# EAGLE board Power_Cape (EAGLE 7.7.0)
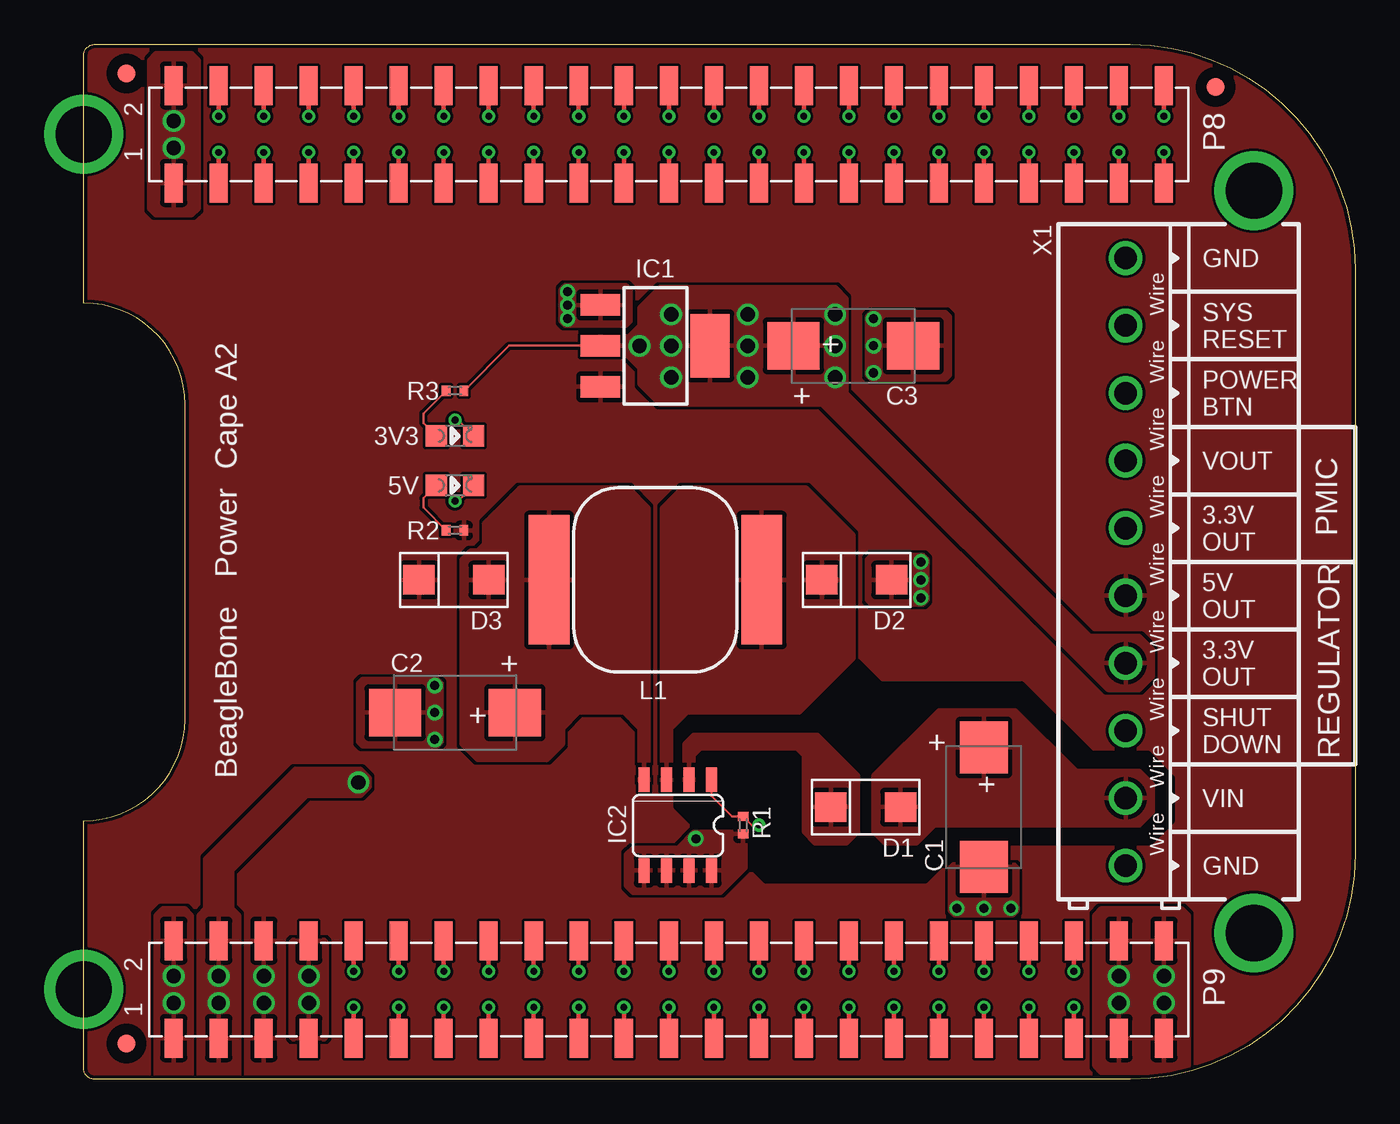
[diagram p0: board, top side]
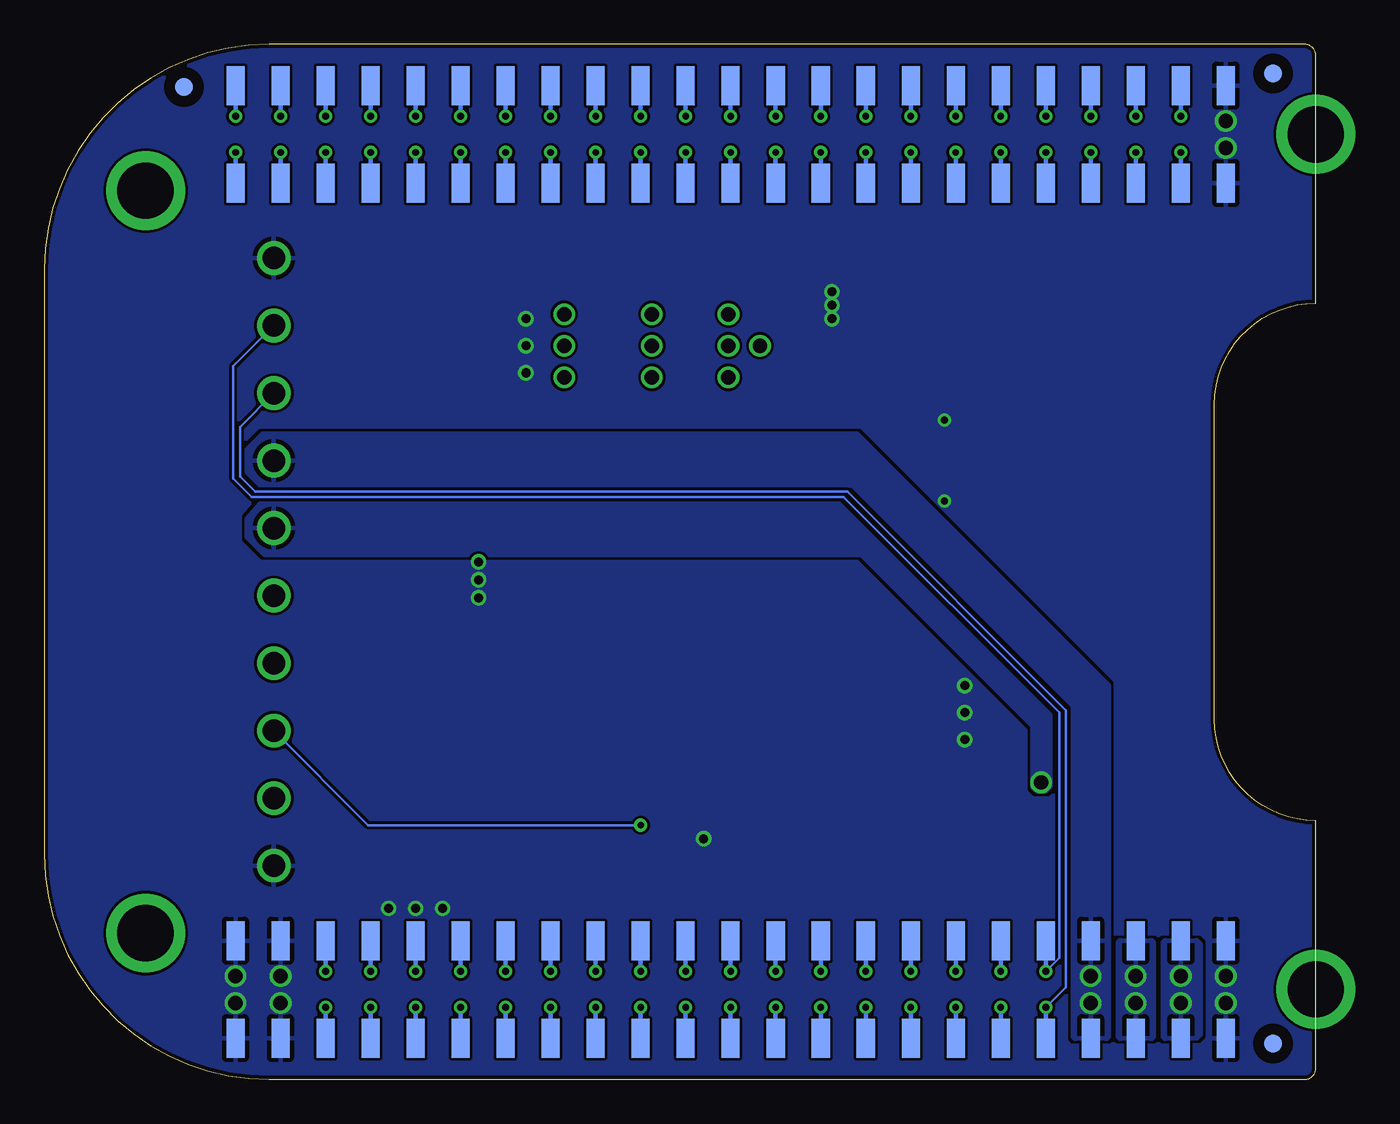
[diagram p1: board, bottom side, seen from below]

Size 71.75 x 58.42 mm. Coordinates in mm from the lower left corner, seen from the top.
Copper layers (1+16): Top 0.035mm / dielectric 1.5mm / Bottom 0.035mm
Design rules "SparkFun-2-layer *": minimum track width 6mil, minimum drill 15mil, track to track 6mil, track to pad 6mil, pad to pad 6mil, via to via 6mil, smd to smd 6mil, copper to edge 8mil, drill to drill 8mil, minimum pad ring 12mil, minimum via ring 7mil, stop-mask expansion 4mil, vias tented up to drill 32mil, thermal gap 10mil
tRestrict: area 32.1,11.4 to 32.4,12.1; area 33.4,11.4 to 33.7,12.1; area 34.7,11.4 to 34.9,12.1; 16 lines

## Footprints (pad centres in the part's own frame; a part is rotated, then mirrored left to right if it is on the bottom)
0805-LED = smd 1.2 x 1.2: A 0,1.05; K 0,-1.05
BEAGLEBONE.CAPE.TOP/BOTTOM-PADS = smd 1.02 x 2.2 bottom: B8.1 5.08,50.59; B8.2 5.08,56.09; B8.3 7.62,50.59; B8.4 7.62,56.09; B8.5 10.16,50.59; B8.6 10.16,56.09; B8.7 12.7,50.59; B8.8 12.7,56.09; B8.9 15.24,50.59; B8.10 15.24,56.09; B8.11 17.78,50.59; B8.12 17.78,56.09; B8.13 20.32,50.59; B8.14 20.32,56.09; B8.15 22.86,50.59; B8.16 22.86,56.09; B8.17 25.4,50.59; B8.18 25.4,56.09; B8.19 27.94,50.59; B8.20 27.94,56.09; B8.21 30.48,50.59; B8.22 30.48,56.09; B8.23 33.02,50.59; B8.24 33.02,56.09; B8.25 35.56,50.59; B8.26 35.56,56.09; B8.27 38.1,50.59; B8.28 38.1,56.09; B8.29 40.64,50.59; B8.30 40.64,56.09; B8.31 43.18,50.59; B8.32 43.18,56.09; B8.33 45.72,50.59; B8.34 45.72,56.09; B8.35 48.26,50.59; B8.36 48.26,56.09; B8.37 50.8,50.59; B8.38 50.8,56.09; B8.39 53.34,50.59; B8.40 53.34,56.09; B8.41 55.88,50.59; B8.42 55.88,56.09; B8.43 58.42,50.59; B8.44 58.42,56.09; B8.45 60.96,50.59; B8.46 60.96,56.09; B9.1 5.08,2.33; B9.2 5.08,7.83; B9.3 7.62,2.33; B9.4 7.62,7.83; B9.5 10.16,2.33; B9.6 10.16,7.83; B9.7 12.7,2.33; B9.8 12.7,7.83; B9.9 15.24,2.33; B9.10 15.24,7.83; B9.11 17.78,2.33; B9.12 17.78,7.83; B9.13 20.32,2.33; B9.14 20.32,7.83; B9.15 22.86,2.33; B9.16 22.86,7.83; B9.17 25.4,2.33; B9.18 25.4,7.83; B9.19 27.94,2.33; B9.20 27.94,7.83; B9.21 30.48,2.33; B9.22 30.48,7.83; B9.23 33.02,2.33; B9.24 33.02,7.83; B9.25 35.56,2.33; B9.26 35.56,7.83; B9.27 38.1,2.33; B9.28 38.1,7.83; B9.29 40.64,2.33; B9.30 40.64,7.83; B9.31 43.18,2.33; B9.32 43.18,7.83; B9.33 45.72,2.33; B9.34 45.72,7.83; B9.35 48.26,2.33; B9.36 48.26,7.83; B9.37 50.8,2.33; B9.38 50.8,7.83; B9.39 53.34,2.33; B9.40 53.34,7.83; B9.41 55.88,2.33; B9.42 55.88,7.83; B9.43 58.42,2.33; B9.44 58.42,7.83; B9.45 60.96,2.33; B9.46 60.96,7.83 | drill 3.175 pad 4.445: MH.1 0,5.08; MH.2 66.04,8.255; MH.3 66.04,50.165; MH.4 0,53.34 | smd 1.02 x 2.2: T8.1 5.08,50.59; T8.2 5.08,56.09; T8.3 7.62,50.59; T8.4 7.62,56.09; T8.5 10.16,50.59; T8.6 10.16,56.09; T8.7 12.7,50.59; T8.8 12.7,56.09; T8.9 15.24,50.59; T8.10 15.24,56.09; T8.11 17.78,50.59; T8.12 17.78,56.09; T8.13 20.32,50.59; T8.14 20.32,56.09; T8.15 22.86,50.59; T8.16 22.86,56.09; T8.17 25.4,50.59; T8.18 25.4,56.09; T8.19 27.94,50.59; T8.20 27.94,56.09; T8.21 30.48,50.59; T8.22 30.48,56.09; T8.23 33.02,50.59; T8.24 33.02,56.09; T8.25 35.56,50.59; T8.26 35.56,56.09; T8.27 38.1,50.59; T8.28 38.1,56.09; T8.29 40.64,50.59; T8.30 40.64,56.09; T8.31 43.18,50.59; T8.32 43.18,56.09; T8.33 45.72,50.59; T8.34 45.72,56.09; T8.35 48.26,50.59; T8.36 48.26,56.09; T8.37 50.8,50.59; T8.38 50.8,56.09; T8.39 53.34,50.59; T8.40 53.34,56.09; T8.41 55.88,50.59; T8.42 55.88,56.09; T8.43 58.42,50.59; T8.44 58.42,56.09; T8.45 60.96,50.59; T8.46 60.96,56.09; T9.1 5.08,2.33; T9.2 5.08,7.83; T9.3 7.62,2.33; T9.4 7.62,7.83; T9.5 10.16,2.33; T9.6 10.16,7.83; T9.7 12.7,2.33; T9.8 12.7,7.83; T9.9 15.24,2.33; T9.10 15.24,7.83; T9.11 17.78,2.33; T9.12 17.78,7.83; T9.13 20.32,2.33; T9.14 20.32,7.83; T9.15 22.86,2.33; T9.16 22.86,7.83; T9.17 25.4,2.33; T9.18 25.4,7.83; T9.19 27.94,2.33; T9.20 27.94,7.83; T9.21 30.48,2.33; T9.22 30.48,7.83; T9.23 33.02,2.33; T9.24 33.02,7.83; T9.25 35.56,2.33; T9.26 35.56,7.83; T9.27 38.1,2.33; T9.28 38.1,7.83; T9.29 40.64,2.33; T9.30 40.64,7.83; T9.31 43.18,2.33; T9.32 43.18,7.83; T9.33 45.72,2.33; T9.34 45.72,7.83; T9.35 48.26,2.33; T9.36 48.26,7.83; T9.37 50.8,2.33; T9.38 50.8,7.83; T9.39 53.34,2.33; T9.40 53.34,7.83; T9.41 55.88,2.33; T9.42 55.88,7.83; T9.43 58.42,2.33; T9.44 58.42,7.83; T9.45 60.96,2.33; T9.46 60.96,7.83
D/7343-31W = smd 2.95 x 2.7: + 3.375,0; - -3.375,0
DIODE_SMA = smd 1.778 x 1.676: A -1.905,0; K 2.032,0
FIDUCIAL_40MIL = smd 1.016 x 1.016: P$1 0,0
SOT223 = smd 1.219 x 2.235: 1 -2.311,-3.099; 2 0,-3.099; 3 2.311,-3.099 | smd 3.6 x 2.2: 4 0,3.099
SO8 = smd 0.635 x 1.397: 1 -1.905,-2.565; 2 -0.635,-2.565; 3 0.635,-2.565; 4 1.905,-2.565; 5 1.905,2.565; 6 0.635,2.565; 7 -0.635,2.565; 8 -1.905,2.565
UP2B-(UNI-PAC) = smd 2.3 x 7.3: 1 -6,0; 2 6,0
0402 = smd 0.5 x 0.6: 1 -0.5,0; 2 0.5,0
TERMINAL.BLOCK-10TERM-150MIL.PITCH = drill 1.27 pad 1.905: 1 -17.145,0; 2 -13.335,0; 3 -9.525,0; 4 -5.715,0; 5 -1.905,0; 6 1.905,0; 7 5.715,0; 8 9.525,0; 9 13.335,0; 10 17.145,0

## Placement (x,y rotation side)
3V3  RED  [0805-LED]  20.95,36.32 90 top
5V  RED  [0805-LED]  20.95,33.53 90 top
BB.CAPE1  BEAGLEBONE.CAPE.TOP/BOTTOM-PADS  [BEAGLEBONE.CAPE.TOP/BOTTOM-PADS]  0,0 0 top
C1  15uF 35V T491D156K035AT  [D/7343-31W]  50.8,15.37 90 top
C2  220uF 6.3V B45197A1227K409  [D/7343-31W]  20.95,20.7 0 top
C3  220uF 6.3V B45197A1227K409  [D/7343-31W]  43.43,41.4 180 top
D1  STPS140A  [DIODE_SMA]  44.2,15.37 180 top
D2  B130  [DIODE_SMA]  43.69,28.19 180 top
D3  STPS140A  [DIODE_SMA]  20.95,28.19 180 top
FUD1  FIDUCIAL  [FIDUCIAL_40MIL]  2.41,2.03 0 top
FUD2  FIDUCIAL  [FIDUCIAL_40MIL]  63.88,56.01 0 top
FUD3  FIDUCIAL  [FIDUCIAL_40MIL]  2.41,56.77 0 top
FUD4  FIDUCIAL  [FIDUCIAL_40MIL]  2.41,2.03 0 bottom
FUD5  FIDUCIAL  [FIDUCIAL_40MIL]  63.88,56.01 0 bottom
FUD6  FIDUCIAL  [FIDUCIAL_40MIL]  2.41,56.77 0 bottom
IC1  LM1117MP-3.3  [SOT223]  32.26,41.4 270 top
IC2  MIC4680-ADJ  [SO8]  33.53,14.35 180 top
L1  68uH  [UP2B-(UNI-PAC)]  32.26,28.19 180 top
R1  1k  [0402]  37.21,14.35 270 top
R2  1k  [0402]  20.95,30.99 180 top
R3  1k  [0402]  20.95,38.86 180 top
X1  [TERMINAL.BLOCK-10TERM-150MIL.PITCH]  58.8,29.21 270 top

## Library data of the parts
3V3 5V L1 R1-R3 = GHI-BasicComponents
BB.CAPE1 = GHI-Solutions
C1-C3 = rcl
D1-D3 FUD1-FUD6 IC1 IC2 = GHI
X1 = GHI-Connectors

## Nets
5VOUT.A: D2.K IC2.3 L1.1
5VOUT.B: C2.+ D3.A IC2.4 L1.2
+5V [power]: BB.CAPE1.B9.5 BB.CAPE1.B9.6 BB.CAPE1.T9.5 BB.CAPE1.T9.6 D3.K IC1.3 R2.1 X1.6
GND: 3V3.K 5V.K BB.CAPE1.B8.1 BB.CAPE1.B8.2 BB.CAPE1.B9.1 BB.CAPE1.B9.2 BB.CAPE1.B9.43 BB.CAPE1.B9.44 BB.CAPE1.B9.45 BB.CAPE1.B9.46 BB.CAPE1.T8.1 BB.CAPE1.T8.2 BB.CAPE1.T9.1 BB.CAPE1.T9.2 BB.CAPE1.T9.43 BB.CAPE1.T9.44 BB.CAPE1.T9.45 BB.CAPE1.T9.46 C1.- C2.- C3.- D2.A IC1.1 IC2.5 IC2.6 IC2.7 IC2.8 R1.2 X1.1 X1.10
N$3: 5V.A R2.2
N$36: 3V3.A R3.2
P8.3: BB.CAPE1.B8.3 BB.CAPE1.T8.3
P8.4: BB.CAPE1.B8.4 BB.CAPE1.T8.4
P8.5: BB.CAPE1.B8.5 BB.CAPE1.T8.5
P8.6: BB.CAPE1.B8.6 BB.CAPE1.T8.6
P8.7: BB.CAPE1.B8.7 BB.CAPE1.T8.7
P8.8: BB.CAPE1.B8.8 BB.CAPE1.T8.8
P8.9: BB.CAPE1.B8.9 BB.CAPE1.T8.9
P8.10: BB.CAPE1.B8.10 BB.CAPE1.T8.10
P8.11: BB.CAPE1.B8.11 BB.CAPE1.T8.11
P8.12: BB.CAPE1.B8.12 BB.CAPE1.T8.12
P8.13: BB.CAPE1.B8.13 BB.CAPE1.T8.13
P8.14: BB.CAPE1.B8.14 BB.CAPE1.T8.14
P8.15: BB.CAPE1.B8.15 BB.CAPE1.T8.15
P8.16: BB.CAPE1.B8.16 BB.CAPE1.T8.16
P8.17: BB.CAPE1.B8.17 BB.CAPE1.T8.17
P8.18: BB.CAPE1.B8.18 BB.CAPE1.T8.18
P8.19: BB.CAPE1.B8.19 BB.CAPE1.T8.19
P8.20: BB.CAPE1.B8.20 BB.CAPE1.T8.20
P8.21: BB.CAPE1.B8.21 BB.CAPE1.T8.21
P8.22: BB.CAPE1.B8.22 BB.CAPE1.T8.22
P8.23: BB.CAPE1.B8.23 BB.CAPE1.T8.23
P8.24: BB.CAPE1.B8.24 BB.CAPE1.T8.24
P8.25: BB.CAPE1.B8.25 BB.CAPE1.T8.25
P8.26: BB.CAPE1.B8.26 BB.CAPE1.T8.26
P8.27: BB.CAPE1.B8.27 BB.CAPE1.T8.27
P8.28: BB.CAPE1.B8.28 BB.CAPE1.T8.28
P8.29: BB.CAPE1.B8.29 BB.CAPE1.T8.29
P8.30: BB.CAPE1.B8.30 BB.CAPE1.T8.30
P8.31: BB.CAPE1.B8.31 BB.CAPE1.T8.31
P8.32: BB.CAPE1.B8.32 BB.CAPE1.T8.32
P8.33: BB.CAPE1.B8.33 BB.CAPE1.T8.33
P8.34: BB.CAPE1.B8.34 BB.CAPE1.T8.34
P8.35: BB.CAPE1.B8.35 BB.CAPE1.T8.35
P8.36: BB.CAPE1.B8.36 BB.CAPE1.T8.36
P8.37: BB.CAPE1.B8.37 BB.CAPE1.T8.37
P8.38: BB.CAPE1.B8.38 BB.CAPE1.T8.38
P8.39: BB.CAPE1.B8.39 BB.CAPE1.T8.39
P8.40: BB.CAPE1.B8.40 BB.CAPE1.T8.40
P8.41: BB.CAPE1.B8.41 BB.CAPE1.T8.41
P8.42: BB.CAPE1.B8.42 BB.CAPE1.T8.42
P8.43: BB.CAPE1.B8.43 BB.CAPE1.T8.43
P8.44: BB.CAPE1.B8.44 BB.CAPE1.T8.44
P8.45: BB.CAPE1.B8.45 BB.CAPE1.T8.45
P8.46: BB.CAPE1.B8.46 BB.CAPE1.T8.46
P9.11: BB.CAPE1.B9.11 BB.CAPE1.T9.11
P9.12: BB.CAPE1.B9.12 BB.CAPE1.T9.12
P9.13: BB.CAPE1.B9.13 BB.CAPE1.T9.13
P9.14: BB.CAPE1.B9.14 BB.CAPE1.T9.14
P9.15: BB.CAPE1.B9.15 BB.CAPE1.T9.15
P9.16: BB.CAPE1.B9.16 BB.CAPE1.T9.16
P9.17: BB.CAPE1.B9.17 BB.CAPE1.T9.17
P9.18: BB.CAPE1.B9.18 BB.CAPE1.T9.18
P9.19: BB.CAPE1.B9.19 BB.CAPE1.T9.19
P9.20: BB.CAPE1.B9.20 BB.CAPE1.T9.20
P9.21: BB.CAPE1.B9.21 BB.CAPE1.T9.21
P9.22: BB.CAPE1.B9.22 BB.CAPE1.T9.22
P9.23: BB.CAPE1.B9.23 BB.CAPE1.T9.23
P9.24: BB.CAPE1.B9.24 BB.CAPE1.T9.24
P9.25: BB.CAPE1.B9.25 BB.CAPE1.T9.25
P9.26: BB.CAPE1.B9.26 BB.CAPE1.T9.26
P9.27: BB.CAPE1.B9.27 BB.CAPE1.T9.27
P9.28: BB.CAPE1.B9.28 BB.CAPE1.T9.28
P9.29: BB.CAPE1.B9.29 BB.CAPE1.T9.29
P9.30: BB.CAPE1.B9.30 BB.CAPE1.T9.30
P9.31: BB.CAPE1.B9.31 BB.CAPE1.T9.31
P9.32: BB.CAPE1.B9.32 BB.CAPE1.T9.32
P9.33: BB.CAPE1.B9.33 BB.CAPE1.T9.33
P9.34: BB.CAPE1.B9.34 BB.CAPE1.T9.34
P9.35: BB.CAPE1.B9.35 BB.CAPE1.T9.35
P9.36: BB.CAPE1.B9.36 BB.CAPE1.T9.36
P9.37: BB.CAPE1.B9.37 BB.CAPE1.T9.37
P9.38: BB.CAPE1.B9.38 BB.CAPE1.T9.38
P9.39: BB.CAPE1.B9.39 BB.CAPE1.T9.39
P9.40: BB.CAPE1.B9.40 BB.CAPE1.T9.40
P9.41: BB.CAPE1.B9.41 BB.CAPE1.T9.41
P9.42: BB.CAPE1.B9.42 BB.CAPE1.T9.42
PWR.BTN: BB.CAPE1.B9.9 BB.CAPE1.T9.9 X1.3
REG.SHUTDOWN: IC2.1 R1.1 X1.8
REGULATED.3V3: C3.+ IC1.2 IC1.4 R3.1 X1.7
SYS.RESET#: BB.CAPE1.B9.10 BB.CAPE1.T9.10 X1.2
SYS.VOUT: BB.CAPE1.B9.7 BB.CAPE1.B9.8 BB.CAPE1.T9.7 BB.CAPE1.T9.8 X1.4
VCC: BB.CAPE1.B9.3 BB.CAPE1.B9.4 BB.CAPE1.T9.3 BB.CAPE1.T9.4 X1.5
VIN: C1.+ D1.A X1.9
VIN.K: D1.K IC2.2

## Tracks (layer width: path | path; a pad name or v marks a point on that pad's centre or on a via)
5VOUT.A
  pour Top: 32.64,16.51 33.15,16.51 33.15,19.81 34.04,20.7 40.39,20.7 43.43,23.75 43.43,30.73 40.77,33.4 33.78,33.4 32.64,32.26
5VOUT.B
  pour Top: 31.37,16.51 31.88,16.51 31.88,32.26 30.73,33.4 24.64,33.4 22.61,31.37 22.61,30.23 22.23,29.84 21.84,29.84 21.34,29.34 21.34,18.92 22.23,18.03 26.16,18.03 27.05,18.92 27.05,19.81 27.94,20.7 30.48,20.7 31.37,19.81
+5V  (via drill 0.81 pad 0.18)
  other vias: 10.16,4.32 10.16,5.84
  pour Top (rank 3): -1.27,59.69 73.03,59.69 73.03,-1.27 -1.27,-1.27
  pour Bottom: 10.79,8.13 9.53,8.13 9.14,7.75 9.14,2.41 9.53,2.03 10.79,2.03 11.18,2.41 11.18,7.75
GND  (via drill 0.38 pad 0.18, 0.51 pad 0.18, 0.81 pad 0.18)
  Top 0.152: 5V.K 21.12,32.64 v20.95,32.64 | 3V3.K 21.12,37.21 v20.95,37.21
  other vias: 58.42,4.32 60.96,4.32 5.08,52.58 27.3,43.69 44.58,41.4 47.24,28.19 47.24,29.21 47.24,27.18 44.58,42.93 44.58,39.88 27.3,44.45 27.3,42.93 19.81,20.7 19.81,19.18 19.81,22.23 50.8,9.65 49.28,9.65 52.32,9.65 34.54,13.59 5.08,54.1 58.42,5.84 60.96,5.84 5.08,5.84 5.08,4.32
  pour Bottom (rank 2): 72.39,59.05 -0.64,59.05 -0.64,-0.64 72.39,-0.64
  pour Top: 61.98,9.65 57.4,9.65 57.02,9.27 57.02,0.76 57.4,0.38 61.98,0.38 62.36,0.76 62.36,9.27
  pour Top: 4.06,57.91 6.1,57.91 6.48,57.53 6.48,49.15 6.1,48.77 4.06,48.77 3.68,49.15 3.68,57.53
  pour Top: 33.53,13.08 30.99,13.08 30.61,12.7 30.61,10.92 30.99,10.54 35.94,10.54 36.32,10.92 37.34,11.94 37.34,13.97 34.42,13.97
  pour Top: 27.18,42.55 30.61,42.55 30.86,42.8 30.86,44.58 30.61,44.83 27.18,44.83 26.92,44.58 26.92,42.8
  pour Top: 44.45,39.5 48.64,39.5 48.9,39.75 48.9,43.05 48.64,43.31 44.45,43.31 44.2,43.05 44.2,39.75
  pour Top: 47.37,29.59 44.45,29.59 44.2,29.34 44.2,27.05 44.45,26.8 47.37,26.8 47.62,27.05 47.62,29.34
  pour Top: 19.94,22.61 15.75,22.61 15.49,22.35 15.49,19.05 15.75,18.8 19.94,18.8 20.19,19.05 20.19,22.35
  pour Top: 52.7,9.53 52.7,11.94 52.45,12.19 49.15,12.19 48.9,11.94 48.9,9.53 49.15,9.27 52.45,9.27
  pour Top: 5.71,9.65 4.45,9.65 4.06,9.27 4.06,-0.13 6.1,-0.13 6.1,9.27
N$3
  Top 0.152: 5V.A 19.18,32.8 19.18,32.27 R2.2
N$36
  Top 0.152: 3V3.A 19.18,37.05 19.18,37.58 R3.2
P8.3  (via drill 0.38 pad 0.18)
  Top 0.254: BB.CAPE1.B8.3 v7.62,52.32
  Bottom 0.254: v7.62,52.32 BB.CAPE1.B8.3
P8.4  (via drill 0.38 pad 0.18)
  Top 0.254: v7.62,54.36 BB.CAPE1.B8.4
  Bottom 0.254: BB.CAPE1.B8.4 v7.62,54.36
P8.5  (via drill 0.38 pad 0.18)
  Top 0.254: v10.16,52.32 BB.CAPE1.B8.5
  Bottom 0.254: BB.CAPE1.B8.5 v10.16,52.32
P8.6  (via drill 0.38 pad 0.18)
  Top 0.254: BB.CAPE1.B8.6 v10.16,54.36
  Bottom 0.254: v10.16,54.36 BB.CAPE1.B8.6
P8.7  (via drill 0.38 pad 0.18)
  Top 0.254: BB.CAPE1.B8.7 v12.7,52.32
  Bottom 0.254: v12.7,52.32 BB.CAPE1.B8.7
P8.8  (via drill 0.38 pad 0.18)
  Top 0.254: v12.7,54.36 BB.CAPE1.T8.8
  Bottom 0.254: BB.CAPE1.T8.8 v12.7,54.36
P8.9  (via drill 0.38 pad 0.18)
  Top 0.254: v15.24,52.32 BB.CAPE1.B8.9
  Bottom 0.254: BB.CAPE1.B8.9 v15.24,52.32
P8.10  (via drill 0.38 pad 0.18)
  Top 0.254: BB.CAPE1.T8.10 v15.24,54.36
  Bottom 0.254: v15.24,54.36 BB.CAPE1.T8.10
P8.11  (via drill 0.38 pad 0.18)
  Top 0.254: BB.CAPE1.T8.11 v17.78,52.32
  Bottom 0.254: v17.78,52.32 BB.CAPE1.T8.11
P8.12  (via drill 0.38 pad 0.18)
  Top 0.254: v17.78,54.36 BB.CAPE1.B8.12
  Bottom 0.254: BB.CAPE1.B8.12 v17.78,54.36
P8.13  (via drill 0.38 pad 0.18)
  Top 0.254: BB.CAPE1.B8.13 v20.32,52.32
  Bottom 0.254: v20.32,52.32 BB.CAPE1.B8.13
P8.14  (via drill 0.38 pad 0.18)
  Top 0.254: BB.CAPE1.B8.14 v20.32,54.36
  Bottom 0.254: v20.32,54.36 BB.CAPE1.B8.14
P8.15  (via drill 0.38 pad 0.18)
  Top 0.254: v22.86,52.32 BB.CAPE1.T8.15
  Bottom 0.254: BB.CAPE1.T8.15 v22.86,52.32
P8.16  (via drill 0.38 pad 0.18)
  Top 0.254: v22.86,54.36 BB.CAPE1.T8.16
  Bottom 0.254: BB.CAPE1.T8.16 v22.86,54.36
P8.17  (via drill 0.38 pad 0.18)
  Top 0.254: BB.CAPE1.B8.17 v25.4,52.32
  Bottom 0.254: v25.4,52.32 BB.CAPE1.B8.17
P8.18  (via drill 0.38 pad 0.18)
  Top 0.254: BB.CAPE1.T8.18 v25.4,54.36
  Bottom 0.254: v25.4,54.36 BB.CAPE1.T8.18
P8.19  (via drill 0.38 pad 0.18)
  Top 0.254: v27.94,52.32 BB.CAPE1.T8.19
  Bottom 0.254: BB.CAPE1.T8.19 v27.94,52.32
P8.20  (via drill 0.38 pad 0.18)
  Top 0.254: BB.CAPE1.B8.20 v27.94,54.36
  Bottom 0.254: v27.94,54.36 BB.CAPE1.B8.20
P8.21  (via drill 0.38 pad 0.18)
  Top 0.254: BB.CAPE1.T8.21 v30.48,52.32
  Bottom 0.254: v30.48,52.32 BB.CAPE1.T8.21
P8.22  (via drill 0.38 pad 0.18)
  Top 0.254: v30.48,54.36 BB.CAPE1.B8.22
  Bottom 0.254: BB.CAPE1.B8.22 v30.48,54.36
P8.23  (via drill 0.38 pad 0.18)
  Top 0.254: v33.02,52.32 BB.CAPE1.T8.23
  Bottom 0.254: BB.CAPE1.T8.23 v33.02,52.32
P8.24  (via drill 0.38 pad 0.18)
  Top 0.254: BB.CAPE1.T8.24 v33.02,54.36
  Bottom 0.254: v33.02,54.36 BB.CAPE1.T8.24
P8.25  (via drill 0.38 pad 0.18)
  Top 0.254: BB.CAPE1.T8.25 v35.56,52.32
  Bottom 0.254: v35.56,52.32 BB.CAPE1.T8.25
P8.26  (via drill 0.38 pad 0.18)
  Top 0.254: v35.56,54.36 BB.CAPE1.B8.26
  Bottom 0.254: BB.CAPE1.B8.26 v35.56,54.36
P8.27  (via drill 0.38 pad 0.18)
  Top 0.254: v38.1,52.32 BB.CAPE1.T8.27
  Bottom 0.254: BB.CAPE1.T8.27 v38.1,52.32
P8.28  (via drill 0.38 pad 0.18)
  Top 0.254: BB.CAPE1.T8.28 v38.1,54.36
  Bottom 0.254: v38.1,54.36 BB.CAPE1.T8.28
P8.29  (via drill 0.38 pad 0.18)
  Top 0.254: BB.CAPE1.B8.29 v40.64,52.32
  Bottom 0.254: v40.64,52.32 BB.CAPE1.B8.29
P8.30  (via drill 0.38 pad 0.18)
  Top 0.254: v40.64,54.36 BB.CAPE1.B8.30
  Bottom 0.254: BB.CAPE1.B8.30 v40.64,54.36
P8.31  (via drill 0.38 pad 0.18)
  Top 0.254: v43.18,52.32 BB.CAPE1.B8.31
  Bottom 0.254: BB.CAPE1.B8.31 v43.18,52.32
P8.32  (via drill 0.38 pad 0.18)
  Top 0.254: BB.CAPE1.B8.32 v43.18,54.36
  Bottom 0.254: v43.18,54.36 BB.CAPE1.B8.32
P8.33  (via drill 0.38 pad 0.18)
  Top 0.254: v45.72,52.32 BB.CAPE1.T8.33
  Bottom 0.254: BB.CAPE1.T8.33 v45.72,52.32
P8.34  (via drill 0.38 pad 0.18)
  Top 0.254: v45.72,54.36 BB.CAPE1.T8.34
  Bottom 0.254: BB.CAPE1.T8.34 v45.72,54.36
P8.35  (via drill 0.38 pad 0.18)
  Top 0.254: BB.CAPE1.B8.35 v48.26,52.32
  Bottom 0.254: v48.26,52.32 BB.CAPE1.B8.35
P8.36  (via drill 0.38 pad 0.18)
  Top 0.254: v48.26,54.36 BB.CAPE1.T8.36
  Bottom 0.254: BB.CAPE1.T8.36 v48.26,54.36
P8.37  (via drill 0.38 pad 0.18)
  Top 0.254: v50.8,52.32 BB.CAPE1.B8.37
  Bottom 0.254: BB.CAPE1.B8.37 v50.8,52.32
P8.38  (via drill 0.38 pad 0.18)
  Top 0.254: BB.CAPE1.B8.38 v50.8,54.36
  Bottom 0.254: v50.8,54.36 BB.CAPE1.B8.38
P8.39  (via drill 0.38 pad 0.18)
  Top 0.254: BB.CAPE1.B8.39 v53.34,52.32
  Bottom 0.254: v53.34,52.32 BB.CAPE1.B8.39
P8.40  (via drill 0.38 pad 0.18)
  Top 0.254: v53.34,54.36 BB.CAPE1.B8.40
  Bottom 0.254: BB.CAPE1.B8.40 v53.34,54.36
P8.41  (via drill 0.38 pad 0.18)
  Top 0.254: v55.88,52.32 BB.CAPE1.T8.41
  Bottom 0.254: BB.CAPE1.T8.41 v55.88,52.32
P8.42  (via drill 0.38 pad 0.18)
  Top 0.254: BB.CAPE1.T8.42 v55.88,54.36
  Bottom 0.254: v55.88,54.36 BB.CAPE1.T8.42
P8.43  (via drill 0.38 pad 0.18)
  Top 0.254: BB.CAPE1.B8.43 v58.42,52.32
  Bottom 0.254: v58.42,52.32 BB.CAPE1.B8.43
P8.44  (via drill 0.38 pad 0.18)
  Top 0.254: v58.42,54.36 BB.CAPE1.B8.44
  Bottom 0.254: BB.CAPE1.B8.44 v58.42,54.36
P8.45  (via drill 0.38 pad 0.18)
  Top 0.254: v60.96,52.32 BB.CAPE1.T8.45
  Bottom 0.254: BB.CAPE1.T8.45 v60.96,52.32
P8.46  (via drill 0.38 pad 0.18)
  Top 0.254: BB.CAPE1.T8.46 v60.96,54.36
  Bottom 0.254: v60.96,54.36 BB.CAPE1.T8.46
P9.11  (via drill 0.38 pad 0.18)
  Top 0.254: v17.78,4.06 BB.CAPE1.B9.11
  Bottom 0.254: BB.CAPE1.B9.11 v17.78,4.06
P9.12  (via drill 0.38 pad 0.18)
  Top 0.254: v17.78,6.1 BB.CAPE1.B9.12
  Bottom 0.254: BB.CAPE1.B9.12 v17.78,6.1
P9.13  (via drill 0.38 pad 0.18)
  Top 0.254: BB.CAPE1.B9.13 v20.32,4.06
  Bottom 0.254: v20.32,4.06 BB.CAPE1.B9.13
P9.14  (via drill 0.38 pad 0.18)
  Top 0.254: BB.CAPE1.B9.14 v20.32,6.1
  Bottom 0.254: v20.32,6.1 BB.CAPE1.B9.14
P9.15  (via drill 0.38 pad 0.18)
  Top 0.254: v22.86,4.06 BB.CAPE1.T9.15
  Bottom 0.254: BB.CAPE1.T9.15 v22.86,4.06
P9.16  (via drill 0.38 pad 0.18)
  Top 0.254: v22.86,6.1 BB.CAPE1.B9.16
  Bottom 0.254: BB.CAPE1.B9.16 v22.86,6.1
P9.17  (via drill 0.38 pad 0.18)
  Top 0.254: BB.CAPE1.B9.17 v25.4,4.06
  Bottom 0.254: v25.4,4.06 BB.CAPE1.B9.17
P9.18  (via drill 0.38 pad 0.18)
  Top 0.254: BB.CAPE1.T9.18 v25.4,6.1
  Bottom 0.254: v25.4,6.1 BB.CAPE1.T9.18
P9.19  (via drill 0.38 pad 0.18)
  Top 0.254: v27.94,4.06 BB.CAPE1.B9.19
  Bottom 0.254: v27.94,4.06 BB.CAPE1.B9.19
P9.20  (via drill 0.38 pad 0.18)
  Top 0.254: v27.94,6.1 BB.CAPE1.B9.20
  Bottom 0.254: v27.94,6.1 BB.CAPE1.B9.20
P9.21  (via drill 0.38 pad 0.18)
  Top 0.254: v30.48,4.06 BB.CAPE1.T9.21
  Bottom 0.254: BB.CAPE1.T9.21 v30.48,4.06
P9.22  (via drill 0.38 pad 0.18)
  Top 0.254: v30.48,6.1 BB.CAPE1.T9.22
  Bottom 0.254: BB.CAPE1.T9.22 v30.48,6.1
P9.23  (via drill 0.38 pad 0.18)
  Top 0.254: BB.CAPE1.T9.23 v33.02,4.06
  Bottom 0.254: v33.02,4.06 BB.CAPE1.T9.23
P9.24  (via drill 0.38 pad 0.18)
  Top 0.254: BB.CAPE1.B9.24 v33.02,6.1
  Bottom 0.254: v33.02,6.1 BB.CAPE1.B9.24
P9.25  (via drill 0.38 pad 0.18)
  Top 0.254: v35.56,4.06 BB.CAPE1.B9.25
  Bottom 0.254: BB.CAPE1.B9.25 v35.56,4.06
P9.26  (via drill 0.38 pad 0.18)
  Top 0.254: v35.56,6.1 BB.CAPE1.T9.26
  Bottom 0.254: BB.CAPE1.T9.26 v35.56,6.1
P9.27  (via drill 0.38 pad 0.18)
  Top 0.254: BB.CAPE1.T9.27 v38.1,4.06
  Bottom 0.254: v38.1,4.06 BB.CAPE1.T9.27
P9.28  (via drill 0.38 pad 0.18)
  Top 0.254: BB.CAPE1.B9.28 v38.1,6.1
  Bottom 0.254: v38.1,6.1 BB.CAPE1.B9.28
P9.29  (via drill 0.38 pad 0.18)
  Top 0.254: v40.64,4.06 BB.CAPE1.B9.29
  Bottom 0.254: BB.CAPE1.B9.29 v40.64,4.06
P9.30  (via drill 0.38 pad 0.18)
  Top 0.254: BB.CAPE1.T9.30 v40.64,6.1
  Bottom 0.254: v40.64,6.1 BB.CAPE1.T9.30
P9.31  (via drill 0.38 pad 0.18)
  Top 0.254: BB.CAPE1.T9.31 v43.18,4.06
  Bottom 0.254: v43.18,4.06 BB.CAPE1.T9.31
P9.32  (via drill 0.38 pad 0.18)
  Top 0.254: v43.18,6.1 BB.CAPE1.B9.32
  Bottom 0.254: BB.CAPE1.B9.32 v43.18,6.1
P9.33  (via drill 0.38 pad 0.18)
  Top 0.254: v45.72,4.06 BB.CAPE1.T9.33
  Bottom 0.254: BB.CAPE1.T9.33 v45.72,4.06
P9.34  (via drill 0.38 pad 0.18)
  Top 0.254: BB.CAPE1.B9.34 v45.72,6.1
  Bottom 0.254: v45.72,6.1 BB.CAPE1.B9.34
P9.35  (via drill 0.38 pad 0.18)
  Top 0.254: BB.CAPE1.B9.35 v48.26,4.06
  Bottom 0.254: v48.26,4.06 BB.CAPE1.B9.35
P9.36  (via drill 0.38 pad 0.18)
  Top 0.254: v48.26,6.1 BB.CAPE1.B9.36
  Bottom 0.254: BB.CAPE1.B9.36 v48.26,6.1
P9.37  (via drill 0.38 pad 0.18)
  Top 0.254: v50.8,4.06 BB.CAPE1.B9.37
  Bottom 0.254: BB.CAPE1.B9.37 v50.8,4.06
P9.38  (via drill 0.38 pad 0.18)
  Top 0.254: BB.CAPE1.T9.38 v50.8,6.1
  Bottom 0.254: v50.8,6.1 BB.CAPE1.T9.38
P9.39  (via drill 0.38 pad 0.18)
  Top 0.254: BB.CAPE1.T9.39 v53.34,4.06
  Bottom 0.254: v53.34,4.06 BB.CAPE1.T9.39
P9.40  (via drill 0.38 pad 0.18)
  Top 0.254: v53.34,6.1 BB.CAPE1.B9.40
  Bottom 0.254: BB.CAPE1.B9.40 v53.34,6.1
P9.41  (via drill 0.38 pad 0.18)
  Top 0.254: v55.88,4.06 BB.CAPE1.T9.41
  Bottom 0.254: BB.CAPE1.T9.41 v55.88,4.06
P9.42  (via drill 0.38 pad 0.18)
  Top 0.254: BB.CAPE1.B9.42 v55.88,6.1
  Bottom 0.254: v55.88,6.1 BB.CAPE1.B9.42
PWR.BTN  (via drill 0.38 pad 0.18)
  Top 0.254: BB.CAPE1.T9.9 v15.24,4.06
  Bottom 0.152: v15.24,4.06 14.1,5.21 14.1,20.83 26.44,33.17 59.84,33.17 60.71,34.04 60.71,36.83 X1.3
  Bottom 0.254: v15.24,4.06 BB.CAPE1.T9.9
REG.SHUTDOWN  (via drill 0.38 pad 0.18)
  Top 0.152: v38.1,14.35 37.71,14.35 R1.1 36.58,14.85 35.43,16 IC2.1
  Bottom 0.152: v38.1,14.35 53.47,14.35 X1.8
REGULATED.3V3  (via drill 0.81 pad 0.18)
  Top 0.152: R3.1 24,41.4 IC1.2
  other vias: 31.37,41.4 33.15,39.62 33.15,41.4 33.15,43.18 37.47,43.18 37.47,41.4 37.47,39.62 42.42,43.18 42.42,41.4 42.42,39.62
  pour Top: 43.05,38.73 43.05,44.07 42.42,44.7 32.51,44.7 31.37,43.56 31.37,42.55 30.73,41.91 28.19,41.91 28.19,40.89 30.61,40.89 31.37,40.13 31.37,39.24 32.51,38.1 41.66,38.1 57.78,21.97 59.56,21.97 60.33,22.73 60.33,24.26 59.56,25.02 56.77,25.02
SYS.RESET#  (via drill 0.38 pad 0.18)
  Top 0.254: BB.CAPE1.B9.10 v15.24,6.1
  Bottom 0.152: v15.24,6.1 14.48,6.86 14.48,20.7 26.64,32.87 60.05,32.87 61.09,33.91 61.09,40.26 X1.2
  Bottom 0.254: v15.24,6.1 BB.CAPE1.B9.10
SYS.VOUT  (via drill 0.81 pad 0.18)
  other vias: 12.7,4.32 12.7,5.84
  pour Bottom: 11.68,22.23 11.68,2.41 12.06,2.03 13.34,2.03 13.72,2.41 13.72,21.08 26.16,33.53 59.56,33.53 60.33,34.29 60.33,35.56 59.44,36.45 25.91,36.45
  pour Top: 13.34,8.13 12.06,8.13 11.68,7.75 11.68,2.41 12.06,2.03 13.34,2.03 13.72,2.41 13.72,7.75
VCC  (via drill 0.81 pad 0.18)
  other vias: 7.62,4.32 15.49,16.76 7.62,5.84
  pour Bottom: 8.26,8.13 6.99,8.13 6.48,7.62 6.48,2.54 6.99,2.03 8.26,2.03 8.64,2.41 8.64,7.75
  pour Top (rank 2): 6.48,-0.38 8.76,-0.38 8.76,9.27 8.38,9.65 8.38,11.81 12.57,16 15.62,16 16.13,16.51 16.13,17.02 15.62,17.53 11.94,17.53 6.86,12.45 6.86,9.65 6.48,9.27
  pour Bottom: 14.99,16.51 14.99,20.57 26.92,32.51 59.56,32.51 60.33,31.62 60.33,30.61 59.31,29.59 25.65,29.59 16,19.94 16,16.51 15.75,16.26 15.24,16.26
VIN
  pour Top: 60.33,15.11 60.33,16.64 59.56,17.4 56.01,17.4 52.58,20.83 48.26,20.83 44.58,17.14 44.58,13.97 45.21,13.34 46.99,13.34 48.01,14.35 59.56,14.35
VIN.K
  pour Top: 33.91,16.51 34.42,16.51 34.42,18.29 34.8,18.67 40.26,18.67 40.64,18.29 40.64,13.97 41.27,13.34 43.05,13.34 43.69,13.97 43.69,17.14 41.4,19.43 34.42,19.43 33.91,18.92

## Text on the board
tPlace: GND | SYS / RESET | A2 | + | POWER / BTN | Cape | VOUT | PMIC | Power | 3.3V / OUT | 5V / OUT | REGULATOR | + | 3.3V / OUT | BeagleBone | SHUT / DOWN | + | VIN | GND